# Altium PCB l297_l298.PcbDoc
Units mm, origin at the board's own origin, x right, y up, seen from the top; angles counter-clockwise.
Board outline 152.4 x 101.6 mm, 2 copper layers (Top Layer, Bottom Layer); 24 components, 27 nets, 92 pads, 2 vias.
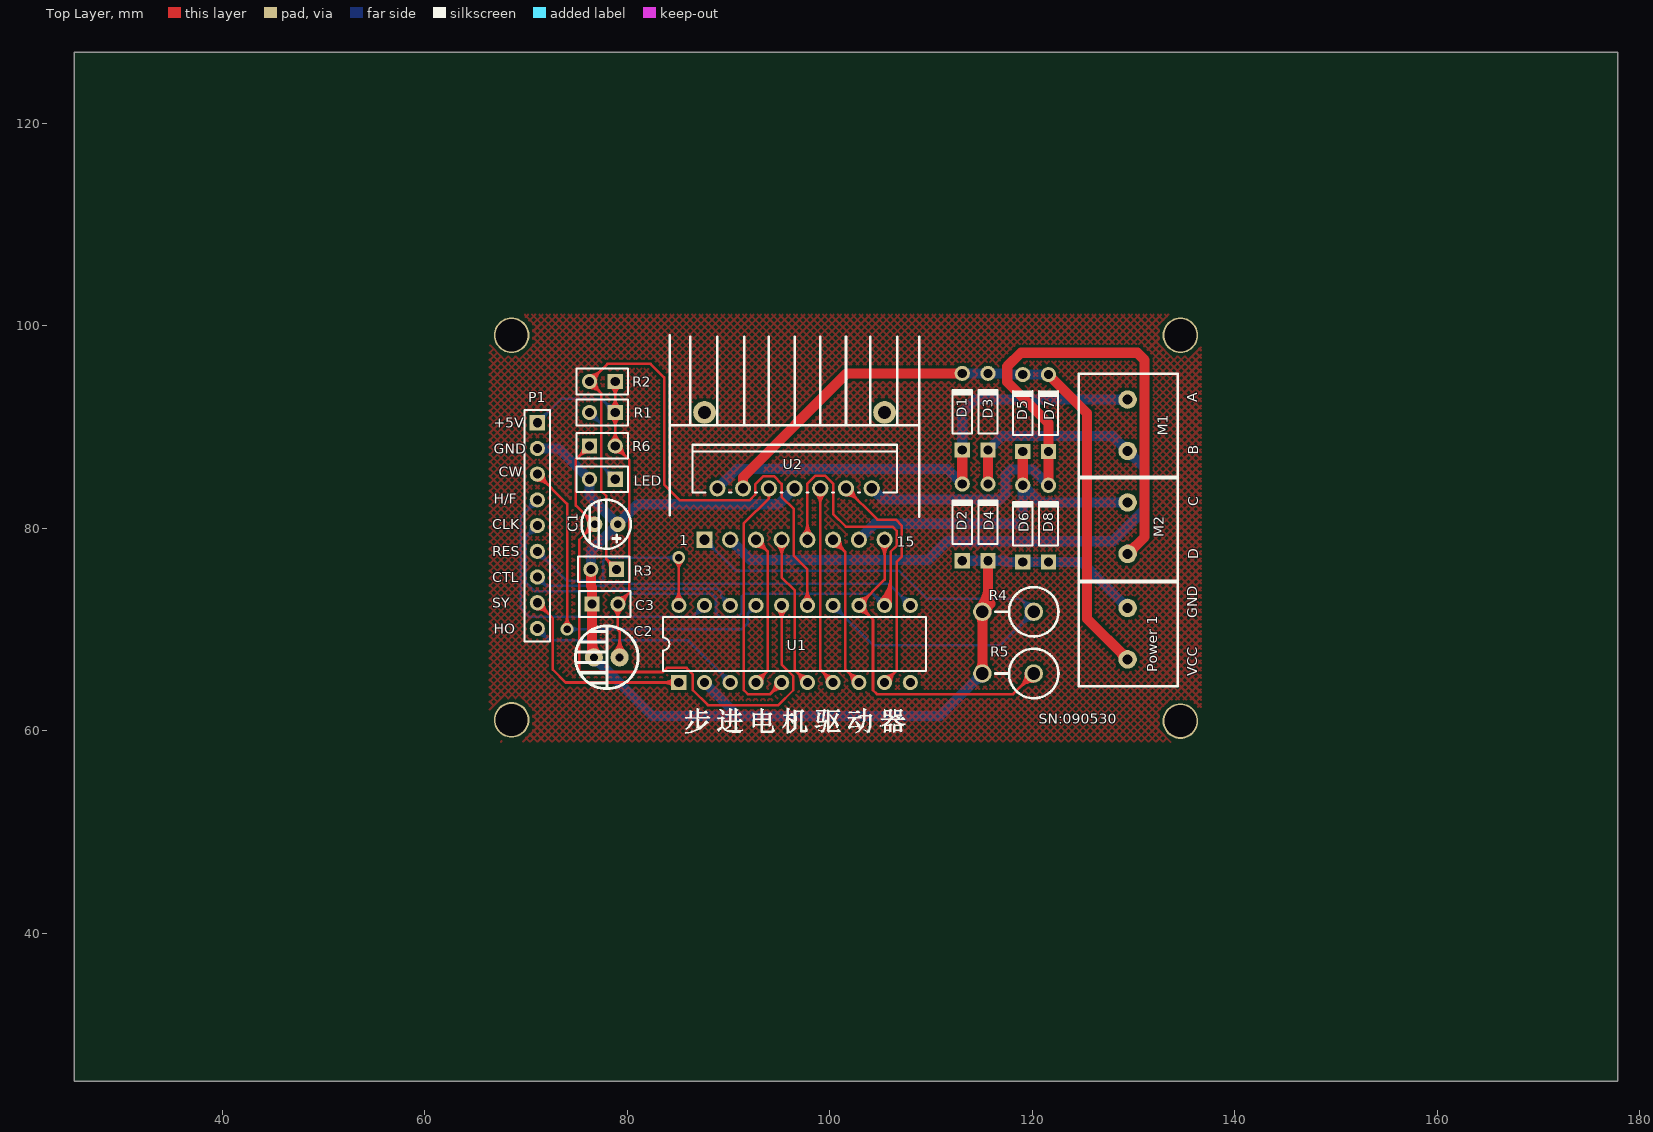
[diagram p0: Top Layer view]
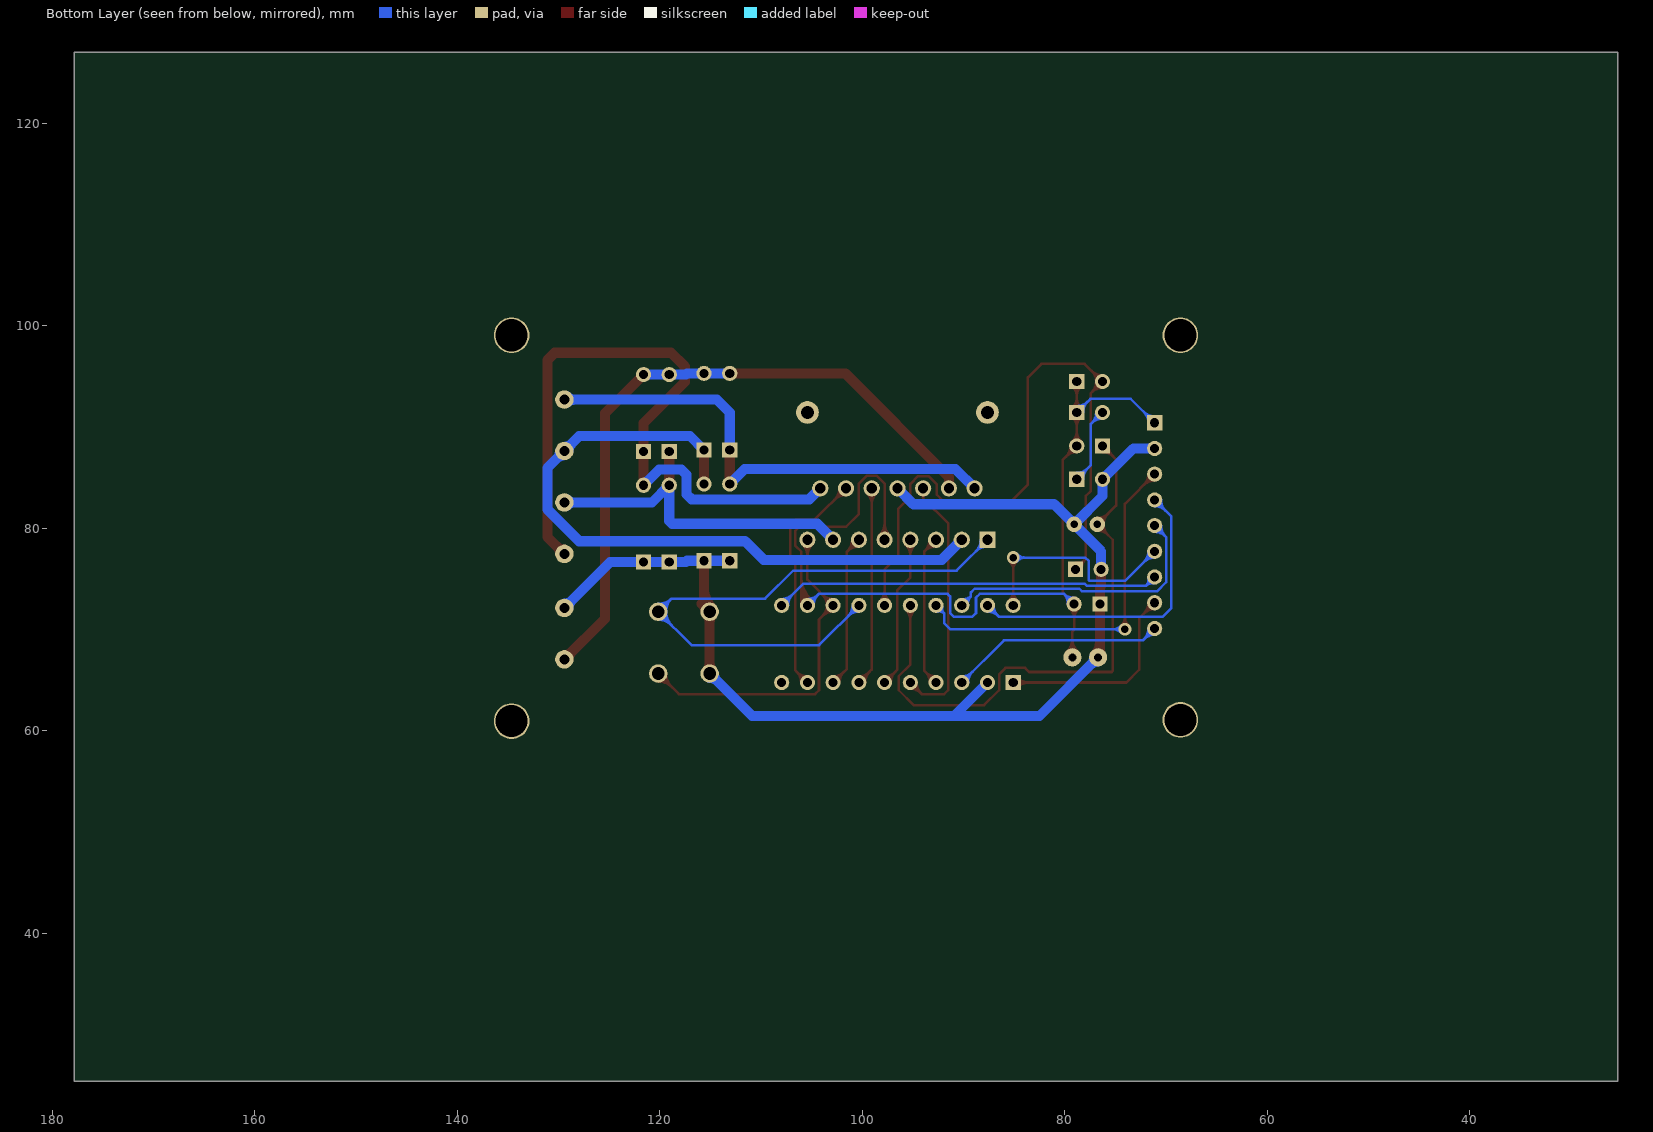
[diagram p1: Bottom Layer view, seen from below]

## Layer stack, top to bottom
Top Layer: signal copper 0.0356
Dielectric: dielectric 0.32, FR-4, Dk 4.8
Bottom Layer: signal copper 0.0356

## Board outline
25.4,25.4 177.8,25.4 177.8,127 25.4,127

## Design rules (kind name [scope] priority, off if disabled: settings)
Clearance [All] p1: gap=0.254
ComponentClearance [All] p1: gap=0.254 collisioncheckmode=3 verticalgap=0.254
PolygonConnect [All] p1: connectstyle=Relief reliefconductorwidth=0.254 reliefentries=4 polygonreliefangle="90 Angle"
RoutingVias [All] p1: holewidth=0.711 width=1.27 viastyle="Through Hole" minholewidth=0.711 minwidth=1.27 maxholewidth=0.711 maxwidth=1.27
SolderMaskExpansion [All] p1: expansion=0.102
TestPointUsage [All] p1: valid=0 allowmultiple=FALSE
Testpoint [All] p1: side=7 testpointundercomponent=TRUE minsize=1.016 maxsize=2.54 preferedsize=1.524 minholesize=0 maxholesize=1.016 preferedholesize=0.813 testpointgrid=0.025 style=1021 order=0123456789
Width Width_6 [InNet('VCC')] p1: maxlimit=1 minlimit=1 preferedwidth=1
Width Width_5 [InNet('NetD7_1')] p2: maxlimit=1 minlimit=1 preferedwidth=1
Width Width_4 [InNet('NetD5_1')] p3: maxlimit=1 minlimit=1 preferedwidth=1
Width Width_3 [InNet('NetD3_1')] p4: maxlimit=1 minlimit=1 preferedwidth=1
Width Width_2 [InNet('NetD1_1')] p5: maxlimit=1 minlimit=1 preferedwidth=1
Width Width_1 [InNet('GND')] p6: maxlimit=1 minlimit=1 preferedwidth=1
Width [All] p7: maxlimit=0.254 minlimit=0.254 preferedwidth=0.254
17 further rules are at their usual default settings.

## Components (designator, comment, footprint, x,y, rotation, side; value= is the part's Value field where it differs from the comment)
C1 "" C-DJ-4 76.657,82.931 r180 top
C2 "" C-DJ-6 76.657,67.183 r180 top
C3 "104" CPDR 77.8,72.517 r0 top
D1 "1N4007" D-ZL-10 113.03,95.25 r90 top
D2 "1N4007" D-ZL-10 113.03,84.328 r90 top
D3 "1N4007" D-ZL-10 115.57,95.25 r90 top
D4 "1N4007" D-ZL-10 115.57,84.328 r90 top
D5 "1N4007" D-ZL-10 118.999,95.123 r90 top
D6 "1N4007" D-ZL-10 118.999,84.201 r90 top
D7 "1N4007" D-ZL-10 121.539,95.123 r90 top
D8 "1N4007" D-ZL-10 121.539,84.201 r90 top
LED "LED" CPDR 77.546,84.836 r180 top (schematic designator DS1)
M1 "" JK128 130.556,92.202 r0 top
M2 "" JK128 130.556,82.042 r0 top
P1 "PZ_9" HDR-9 71.12,75.184 r270 top
"Power 1" "" JK128 130.556,71.628 r0 top
R1 "Res" CPDR 77.546,91.44 r180 top
R2 "Res" CPDR 77.546,94.488 r180 top
R3 "Res" CPDR 77.673,75.946 r180 top
R4 "Res" ZCDZl 117.602,69.215 r270 top
R5 "Res" ZCDZl 117.602,63.119 r270 top
R6 "Res" CPDR 77.546,88.138 r0 top
U1 "L297A" DIP20 96.52,68.58 r0 top
U2 "L298N" L298N 96.52,83.82 r0 top

## Footprints (in the part's own frame and the unit in brackets; to place one, negate y for a bottom-side part, rotate by r counter-clockwise, add the part's x,y. Pads: shape width x height; smd on the part's side, far side on the other; paste and mask are expansions set on the pad)
C-DJ-4 [mil] "电容4mm"
  round 60 hole 30: 1(-95,100) 2(-5,100)
  silkscreen extent -145,5 46,195
C-DJ-6 [mm]
  round 1.8 hole 0.8: 1(-2.591,-0.076) 2(-0.051,-0.076)
  silkscreen extent -4.42,-3.18 1.78,3.02
CPDR [mm] "瓷片电容"
  rect 1.5x1.5 hole 0.9: 1(-1.27,0)
  round 1.5 hole 0.9: 2(1.27,0)
  silkscreen extent -2.54,-1.27 2.54,1.27
D-ZL-10 [mm] "整流二极管"
  rect 1.5x1.5 hole 0.9: 1(-7.532,-0.051)
  round 1.5 hole 0.9: 2(0.048,-0.051)
  silkscreen extent -5.89,-1 -1.49,0.9
DIP20 [mm] "DIP; 20 Leads; Row Spacing 7.62 mm; Pitch 2.54 mm"
  rect 1.5x1.5 hole 0.9: 1(-11.43,-3.81)
  round 1.5 hole 0.9: 2(-8.89,-3.81) 3(-6.35,-3.81) 4(-3.81,-3.81) 5(-1.27,-3.81) 6(1.27,-3.81) 7(3.81,-3.81) 8(6.35,-3.81) 9(8.89,-3.81) 10(11.43,-3.81) 11(11.43,3.81) 12(8.89,3.81) 13(6.35,3.81) 14(3.81,3.81) 15(1.27,3.81) 16(-1.27,3.81) 17(-3.81,3.81) 18(-6.35,3.81) 19(-8.89,3.81) 20(-11.43,3.81)
  silkscreen extent -13,-2.65 13,2.65
HDR-9 [mm]
  rect 1.5x1.5 hole 0.9: 1(-15.24,0)
  round 1.5 hole 0.9: 2(-12.7,0) 3(-10.16,0) 4(-7.62,0) 5(-5.08,0) 6(-2.54,0) 7(0,0) 8(2.54,0) 9(5.08,0)
  silkscreen extent -16.51,-1.27 6.35,1.27
JK128 [mil]
  round 71.81 hole 39.37: 1(-45,20) 2(-45,-180)
  silkscreen extent -235,-285 150,120
L298N [mm] "直流/步进两用驱动器"
  round 2.24 hole 1.262: 0(-8.89,7.62) 0(8.89,7.62)
  rect 1.6x1.6 hole 1: 1(-8.89,-4.953)
  round 1.6 hole 1: 2(-7.62,0.127) 3(-6.35,-4.953) 4(-5.08,0.127) 5(-3.81,-4.953) 6(-2.54,0.127) 7(-1.27,-4.953) 8(0,0.127) 9(1.27,-4.953) 10(2.54,0.127) 11(3.81,-4.953) 12(5.08,0.127) 13(6.35,-4.953) 14(7.62,0.127) 15(8.89,-4.953)
  silkscreen extent -12.32,-2.67 12.32,15.24
ZCDZl [mm] "直插电阻立式插"
  round 1.824 hole 1.262: 1(-2.54,2.54) 2(-2.54,-2.54)
  silkscreen extent -4.98,-1.27 -0.1,4.98

## Part data
C1 C3: library part Cap, "Capacitor"
C2: library part "Cap Pol3", "Polarized Capacitor (Surface Mount)"
D1 D2 D3 D4 D5 D6 D7 D8: library part "Diode 1N4007", "1 Amp General Purpose Rectifier"
LED: "发光二极管"
M1 M2 "Power 1": library part MHDR1X2, "Header, 2-Pin"
P1: "排针——9"
R1 R2 R3 R4 R5 R6: "电阻"
U1: "Stepper Motor Controller"
U2: "Dual Full Bridge Driver"

## Free pads (board coordinates)
  round 3.524 hole 3.162: 0(68.58,61.087) 0(68.58,99.06) 0(134.62,60.96) 0(134.62,99.06)

## Via types
v1: diameter 1.27, hole 0.711, Top Layer to Bottom Layer, 2 vias

## Nets (pads, with @x,y where several pads share a name; then routed paths per layer and width w, separated by ;. In a path a pad name is that pad's centre, name@x,y a point inside that pad or via, vN(x,y) a via of type N, cw(c..) or ccw(c..) an arc to the next point about the centre after c; other vN are vias at no path point)
+5V: C2.1 C3.2 P1.1 R1.1 R2.1 R6.2 U1.12 U2.9 | length 155.1
  Top Layer w0.254: R6.2@78.376,88.579 ccw(c77.312,89.642) 78.816,89.642 ccw(c80.32,89.642) R6.2@79.257,88.579 ; R1.1@78.376,90.999 cw(c77.312,89.936) 78.816,89.936 cw(c80.32,89.936) R1.1@79.257,90.999 ; R1.1@78.376,91.881 ccw(c77.312,92.944) 78.816,92.944 ccw(c80.32,92.944) R1.1@79.257,91.881 ; R2.1@78.376,94.047 cw(c77.312,92.984) 78.816,92.984 cw(c80.32,92.984) R2.1@79.257,94.047 ; R6.2@78.555,88.399 ccw(c77.925,89.029) 78.816,89.029 ccw(c79.707,89.029) R6.2@79.077,88.399 ; R1.1@78.555,91.179 cw(c77.925,90.549) 78.816,90.549 cw(c79.707,90.549) R1.1@79.077,91.179 ; R1.1@78.555,91.701 ccw(c77.925,92.331) 78.816,92.331 ccw(c79.707,92.331) R1.1@79.077,91.701 ; R2.1@78.555,94.227 cw(c77.925,93.597) 78.816,93.597 cw(c79.707,93.597) R2.1@79.077,94.227 ; C3.2@78.63,72.076 cw(c77.566,71.013) 79.07,71.013 cw(c80.574,71.013) C3.2@79.511,72.076 ; C2.1@78.701,67.806 ccw(c77.382,69.125) 79.248,69.125 ccw(c81.114,69.125) C2.1@79.795,67.806 ; C3.2@78.809,72.256 cw(c78.179,71.626) 79.07,71.626 cw(c79.961,71.626) C3.2@79.331,72.256 ; R6.2@78.816,87.515 cw(c78.816,86.011) 79.88,87.074 cw(c80.943,88.138) R6.2@79.439,88.138 ; R6.2@78.816,87.769 cw(c78.816,86.878) 79.446,87.508 cw(c80.076,88.138) R6.2@79.185,88.138 ; R2.1 R1.1 R6.2 80.213,86.741 80.213,73.66 C3.2 79.07,69.977 79.248,69.799 C2.1 ; C2.1@78.881,67.626 ccw(c77.995,68.512) 79.248,68.512 ccw(c80.501,68.512) C2.1@79.615,67.626 ; C3.2@79.07,72.886 ccw(c79.07,73.777) 79.7,73.147 ccw(c80.33,72.517) C3.2@79.439,72.517 ; C3.2@79.07,73.14 ccw(c79.07,74.644) 80.134,73.581 ccw(c81.197,72.517) C3.2@79.693,72.517 ; U2.9@97.314,79.343 ccw(c96.165,80.492) 97.79,80.492 ccw(c99.415,80.492) U2.9@98.266,79.343 ; U2.9@97.494,79.163 ccw(c96.778,79.879) 97.79,79.879 ccw(c98.802,79.879) U2.9@98.086,79.163 ; U2.9 97.79,84.404 98.552,85.166 99.568,85.166 100.33,84.404 100.33,81.407 101.575,80.162 106.185,80.162 106.591,79.756 106.591,78.27 106.02,77.699 106.02,73 ; U1.12@104.969,72.831 ccw(c102.434,75.366) 106.02,75.366 ; U1.12@105.149,72.651 ccw(c103.047,74.753) 106.02,74.753 ; U1.12@105.329,72.471 ccw(c103.661,74.139) 106.02,74.139 ; U1.12 106.02,73 ; U1.12@105.508,72.292 ccw(c104.274,73.526) 106.02,73.526 ; U1.12@105.688,72.112 ccw(c104.887,72.913) 106.02,72.913 ; U1.12@105.69,72.947 ccw(c105.818,73.201) 106.02,73 ; U1.12@105.967,72.67 cw(c106.221,72.798) 106.02,73
  Bottom Layer w0.254: P1.1 73.482,92.786 77.47,92.786 R1.1 ; P1.1@71.12,90.793 ccw(c71.12,91.684) 71.75,91.054 ccw(c72.38,90.424) P1.1@71.489,90.424 ; P1.1@71.12,91.047 ccw(c71.12,92.551) 72.184,91.488 ccw(c73.247,90.424) P1.1@71.743,90.424 ; R1.1@78.193,91.44 ccw(c76.689,91.44) 77.753,92.504 ccw(c78.816,93.567) R1.1@78.816,92.063 ; R1.1@78.447,91.44 ccw(c77.556,91.44) 78.186,92.07 ccw(c78.816,92.7) R1.1@78.816,91.809 ; C3.2 80.074,73.521 ; C3.2@79.086,72.886 ccw(c79.118,73.659) 79.665,73.112 ccw(c80.212,72.565) C3.2@79.439,72.532 ; C3.2@79.096,73.139 ccw(c79.15,74.445) 80.074,73.521 ; C3.2@79.693,72.543 cw(c80.998,72.597) 80.074,73.521 ; U1.12@104.787,72.39 ccw(c103.283,72.39) 104.346,73.454 ccw(c105.41,74.517) U1.12@105.41,73.013 ; U1.12@105.041,72.39 ccw(c104.15,72.39) 104.78,73.02 ccw(c105.41,73.65) U1.12@105.41,72.759 ; U1.12 104.267,73.533 91.567,73.533 91.313,73.279 91.313,71.628 90.932,71.247 89.142,71.247 88.761,71.628 88.761,73.152 88.392,73.521 80.074,73.521
ENA: R4.1 U1.14 U2.1 | length 75.9
  Bottom Layer w0.254: U2.1@87.63,78.194 cw(c87.63,76.569) 88.779,77.718 cw(c89.928,78.867) U2.1@88.303,78.867 ; U2.1@87.63,78.448 cw(c87.63,77.436) 88.345,78.152 cw(c89.061,78.867) U2.1@88.049,78.867 ; U2.1 90.678,75.819 106.807,75.819 109.576,73.05 118.847,73.05 ; U1.14@100.33,71.767 cw(c100.33,70.263) 101.394,71.326 cw(c102.457,72.39) U1.14@100.953,72.39 ; U1.14@100.33,72.021 cw(c100.33,71.13) 100.96,71.76 cw(c101.59,72.39) U1.14@100.699,72.39 ; U1.14 104.267,68.453 116.84,68.453 R4.1 118.847,73.05 ; R4.1@119.357,71.755 cw(c117.462,71.755) 118.802,70.415 cw(c120.142,69.075) R4.1@120.142,70.97 ; R4.1@119.357,71.774 ccw(c117.613,71.816) 118.847,73.05 ; R4.1@119.611,71.755 cw(c118.329,71.755) 119.236,70.849 cw(c120.142,69.942) R4.1@120.142,71.224 ; R4.1@119.611,71.768 ccw(c118.431,71.797) 119.266,72.631 ccw(c120.1,73.466) R4.1@120.129,72.286 ; R4.1@120.123,72.54 cw(c120.081,74.284) 118.847,73.05
ENB: R5.1 U1.13 U2.15 | length 50
  Top Layer w0.254: U1.13@102.87,71.767 cw(c102.87,70.263) 103.934,71.326 cw(c104.997,72.39) 103.493,72.39 cw(c104.997,72.39) 103.934,73.454 cw(c102.87,74.517) U1.13@102.87,73.013 ; U1.13@102.87,72.021 cw(c102.87,71.13) 103.5,71.76 cw(c104.13,72.39) 103.239,72.39 cw(c104.13,72.39) 103.5,73.02 cw(c102.87,73.65) U1.13@102.87,72.759 ; U2.15@104.934,78.391 cw(c103.785,77.242) 105.41,77.242 cw(c107.035,77.242) U2.15@105.886,78.391 ; U2.15@105.114,78.571 cw(c104.398,77.855) 105.41,77.855 cw(c106.422,77.855) U2.15@105.706,78.571 ; U2.15 105.41,74.93 U1.13 104.267,70.993 104.267,64.008 104.648,63.627 118.11,63.627 R5.1 ; R5.1@119.357,65.659 cw(c117.462,65.659) 118.802,64.319 cw(c120.142,62.979) R5.1@120.142,64.874 ; R5.1@119.611,65.659 cw(c118.329,65.659) 119.236,64.753 cw(c120.142,63.846) R5.1@120.142,65.128
GND: "Power 1.1" C1.1 C2.2 C3.1 D2.1 D4.1 D6.1 D8.1 LED.2 P1.2 R3.2 R4.2 R5.2 U1.2 U2.8 | length 136.1
  Top Layer w1: R3.2 76.403,74.295 76.53,74.168 C3.1 76.53,67.437 C2.2 ; 76.53,68.654 ccw(c78.103,68.654) C2.2@76.991,67.542 ; R5.2@114.771,65.95 ccw(c114.067,66.654) 115.062,66.654 ccw(c116.057,66.654) R5.2@115.353,65.95 ; R4.2@114.771,71.464 cw(c114.067,70.76) 115.062,70.76 cw(c116.057,70.76) R4.2@115.353,71.464 ; R4.2@114.771,72.046 ccw(c112.717,74.1) 115.621,74.1 ; R4.2@115.043,72.167 ccw(c115.016,72.771) 115.621,72.771 ; R5.2 R4.2 115.85,72.543 115.621,72.771 ; R4.2@115.062,72.167 ccw(c115.062,73.162) 115.765,72.458 ccw(c116.469,71.755) R4.2@115.474,71.755 ; D4.1 115.621,72.771
  Bottom Layer w1: P1.2 73.228,87.884 LED.2 76.276,83.185 C1.1 ; R3.2 76.403,77.724 C1.1 ; C2.2@76.708,66.859 cw(c76.708,65.894) 77.391,66.576 cw(c78.074,67.259) C2.2@77.108,67.259 ; C2.2 82.499,61.468 90.932,61.468 ; U1.2 90.932,61.468 ; U2.8 94.945,82.372 81.051,82.372 C1.1 ; D2.1 D4.1 117.272,76.796 117.399,76.669 D6.1 D8.1 124.88,76.669 129.413,72.136 ; R5.2@114.65,65.659 cw(c113.655,65.659) 114.359,64.956 cw(c115.062,64.252) R5.2@115.062,65.247 ; R5.2 110.871,61.468 90.932,61.468 ; 129.001,72.136 ccw(c128.006,72.136) 128.71,72.839 ccw(c129.413,73.543) 129.413,72.548
GND-12: 
HOME: P1.9 U1.3 | length 28.8
  Bottom Layer w0.254: P1.9@71.12,69.481 cw(c71.12,67.977) 72.184,69.04 cw(c73.247,70.104) P1.9@71.743,70.104 ; P1.9@71.12,69.735 cw(c71.12,68.844) 71.75,69.474 cw(c72.38,70.104) P1.9@71.489,70.104 ; P1.9 72.288,68.936 86.004,68.936 U1.3 ; U1.3@89.547,64.77 ccw(c88.043,64.77) 89.106,65.834 ccw(c90.17,66.897) U1.3@90.17,65.393 ; U1.3@89.801,64.77 ccw(c88.91,64.77) 89.54,65.4 ccw(c90.17,66.03) U1.3@90.17,65.139
NetC1_2: C1.2 R6.1 U1.16 | length 72.7
  Top Layer w0.254: R6.1@75.653,88.138 cw(c74.149,88.138) 75.213,87.074 cw(c76.276,86.011) R6.1@76.276,87.515 ; R6.1@75.907,88.138 cw(c75.016,88.138) 75.646,87.508 cw(c76.276,86.878) R6.1@76.276,87.769 ; R6.1 74.93,86.792 74.93,82.245 C1.2 75.26,78.867 75.26,65.913 75.362,65.811 83.515,65.811 83.922,66.218 85.852,66.218 86.487,65.583 86.487,64.008 87.96,62.535 94.92,62.535 96.393,64.008 96.393,65.405 95.25,66.548 U1.16 ; C1.2@76.784,79.756 ccw(c76.784,78.223) 75.7,79.307 ccw(c74.616,80.391) 76.149,80.391 ccw(c74.616,80.391) 75.7,81.475 ccw(c76.784,82.559) C1.2@76.784,81.026 ; C1.2@76.784,80.01 ccw(c76.784,79.09) 76.134,79.741 ccw(c75.483,80.391) 76.403,80.391 ccw(c75.483,80.391) 76.134,81.041 ccw(c76.784,81.692) C1.2@76.784,80.772 ; U1.16@94.809,71.949 cw(c93.746,70.886) 95.25,70.886 cw(c96.754,70.886) U1.16@95.691,71.949 ; U1.16@94.989,72.129 cw(c94.359,71.499) 95.25,71.499 cw(c96.141,71.499) U1.16@95.511,72.129
NetD1_1: D1.1 D2.2 M1.1 U2.2 | length 51.1
  Top Layer w1: D2.2 D1.1
  Bottom Layer w1: U2.2 90.805,85.852 111.606,85.852 D2.2 ; D1.1 113.081,91.44 114.351,92.71 M1.1 ; M1.1@129.122,92.419 ccw(c128.418,91.715) 128.418,92.71 ccw(c128.418,93.705) M1.1@129.122,93.001
NetD3_1: D3.1 D4.2 M1.2 U2.3 | length 71.7
  Top Layer w1: D4.2 D3.1
  Bottom Layer w1: U2.3 92.151,76.886 109.728,76.886 111.557,78.715 127.94,78.715 131.089,81.864 131.089,85.954 M1.2 127.94,89.103 117.006,89.103 D3.1 ; M1.2@129.001,87.63 ccw(c128.006,87.63) 128.71,88.333 ccw(c129.413,89.037) M1.2@129.413,88.042 ; M1.2@129.413,87.218 cw(c129.413,86.223) 130.116,86.927 cw(c130.82,87.63) M1.2@129.825,87.63
NetD5_1: D5.1 D6.2 M2.1 U2.13 | length 36.4
  Top Layer w1: D6.2 D5.1
  Bottom Layer w1: U2.13 104.445,80.442 118.771,80.442 119.05,80.721 D6.2 120.75,82.55 M2.1 ; M2.1@129.122,82.259 ccw(c128.418,81.555) 128.418,82.55 ccw(c128.418,83.545) M2.1@129.122,82.841
NetD7_1: D7.1 D8.2 M2.2 U2.14 | length 70.1
  Top Layer w1: D8.2 D7.1 121.59,90.384 117.526,94.449 117.526,95.987 118.872,97.333 130.353,97.333 131.089,96.596 131.089,79.146 M2.2 ; M2.2@129.413,77.882 ccw(c129.413,78.877) 130.116,78.173 ccw(c130.82,77.47) M2.2@129.825,77.47
  Bottom Layer w1: U2.14 105.232,82.855 116.84,82.855 117.348,83.363 117.348,85.293 117.856,85.801 120.038,85.801 D8.2
NetDS1_1: LED.1 R1.2 | length 15.2
  Bottom Layer w0.254: R1.2@76.276,90.817 cw(c76.276,89.313) 77.34,90.376 cw(c78.403,91.44) R1.2@76.899,91.44 ; R1.2@76.276,91.071 cw(c76.276,90.18) 76.906,90.81 cw(c77.536,91.44) R1.2@76.645,91.44 ; R1.2 77.419,90.297 77.419,86.233 LED.1 ; LED.1@78.193,84.836 ccw(c76.689,84.836) 77.753,85.9 ccw(c78.816,86.963) LED.1@78.816,85.459 ; LED.1@78.447,84.836 ccw(c77.556,84.836) 78.186,85.466 ccw(c78.816,86.096) LED.1@78.816,85.205
NetR2_2: R2.2 R3.1 U1.15 | length 80.8
  Top Layer w0.254: R2.2@76.276,93.865 cw(c76.276,92.361) 77.34,93.424 cw(c78.403,94.488) 76.899,94.488 cw(c78.403,94.488) 77.34,95.552 cw(c76.276,96.615) R2.2@76.276,95.111 ; R2.2@76.276,94.119 cw(c76.276,93.228) 76.906,93.858 cw(c77.536,94.488) 76.645,94.488 cw(c77.536,94.488) 76.906,95.118 cw(c76.276,95.748) R2.2@76.276,94.857 ; R3.1@78.321,75.966 ccw(c76.976,76.011) 77.927,76.962 ; R3.1@78.574,75.958 ccw(c77.778,75.984) 78.341,76.548 ccw(c78.905,77.111) R3.1@78.931,76.315 ; R3.1@78.923,76.569 cw(c78.878,77.913) 77.927,76.962 ; R3.1 77.927,76.962 ; U1.15@97.349,72.831 ccw(c96.286,73.894) 97.79,73.894 ccw(c99.294,73.894) U1.15@98.231,72.831 ; U1.15@97.529,72.651 ccw(c96.899,73.281) 97.79,73.281 ccw(c98.681,73.281) U1.15@98.051,72.651 ; U1.15 97.79,75.921 96.444,77.267 96.444,81.89 95.25,83.083 95.25,84.379 94.488,85.141 93.472,85.141 92.634,84.303 92.634,83.312 92.075,82.753 85.217,82.753 83.642,84.328 83.642,94.894 82.296,96.241 78.029,96.241 R2.2 77.419,93.345 77.419,83.693 77.927,83.185 77.927,76.962
NetU1_4: U1.4 U2.5 | length 22.9
  Top Layer w0.254: U1.4 93.853,65.913 93.853,77.724 ; U1.4@92.71,65.139 ccw(c92.71,66.03) 93.34,65.4 ccw(c93.97,64.77) U1.4@93.079,64.77 ; U1.4@92.71,65.393 ccw(c92.71,66.897) 93.774,65.834 ccw(c94.837,64.77) U1.4@93.333,64.77 ; U2.5 93.853,77.724 ; U2.5@92.712,78.448 cw(c92.715,77.449) 93.422,78.155 cw(c94.128,78.862) U2.5@93.129,78.865 ; U2.5@92.712,78.194 cw(c92.718,76.589) 93.853,77.724 ; U2.5@93.383,78.865 ccw(c94.988,78.859) 93.853,77.724
NetU1_5: U1.5 U2.6 | length 30
  Top Layer w0.254: U2.6@93.736,83.32 cw(c93.597,82.963) 93.98,82.963 ; U2.6 93.98,82.963 ; U2.6@94.224,83.32 ccw(c94.363,82.963) 93.98,82.963 ; U1.5@94.627,64.77 cw(c93.123,64.77) 94.186,63.706 cw(c95.25,62.643) U1.5@95.25,64.147 ; U1.5@94.881,64.77 cw(c93.99,64.77) 94.62,64.14 cw(c95.25,63.51) U1.5@95.25,64.401 ; U1.5 94.107,63.627 91.897,63.627 91.516,64.008 91.516,80.499 93.98,82.963
NetU1_6: U1.6 U2.7 | length 23.1
  Top Layer w0.254: U2.7@94.774,78.391 cw(c93.625,77.242) 95.25,77.242 cw(c96.875,77.242) U2.7@95.726,78.391 ; U2.7@94.954,78.571 cw(c94.238,77.855) 95.25,77.855 cw(c96.262,77.855) U2.7@95.546,78.571 ; U2.7 95.25,75.159 96.52,73.889 96.52,66.04 U1.6 ; U1.6@97.167,64.77 ccw(c95.663,64.77) 96.726,65.834 ccw(c97.79,66.897) U1.6@97.79,65.393 ; U1.6@97.421,64.77 ccw(c96.53,64.77) 97.16,65.4 ccw(c97.79,66.03) U1.6@97.79,65.139
NetU1_7: U1.7 U2.10 | length 27.6
  Top Layer w0.254: U2.10@98.584,83.471 cw(c97.435,82.322) 99.06,82.322 cw(c100.685,82.322) U2.10@99.536,83.471 ; U2.10@98.764,83.651 cw(c98.048,82.935) 99.06,82.935 cw(c100.072,82.935) U2.10@99.356,83.651 ; U2.10 99.06,66.04 U1.7 ; U1.7@99.707,64.77 ccw(c98.203,64.77) 99.266,65.834 ccw(c100.33,66.897) U1.7@100.33,65.393 ; U1.7@99.961,64.77 ccw(c99.07,64.77) 99.7,65.4 ccw(c100.33,66.03) U1.7@100.33,65.139
NetU1_8: U1.8 U2.11 | length 23.1
  Top Layer w0.254: U2.11@100.33,78.194 cw(c100.33,76.569) 101.479,77.718 cw(c102.628,78.867) U2.11@101.003,78.867 ; U2.11@100.33,78.448 cw(c100.33,77.436) 101.045,78.152 cw(c101.761,78.867) U2.11@100.749,78.867 ; U2.11 101.524,77.673 101.524,66.116 U1.8 ; U1.8@102.247,64.77 ccw(c100.743,64.77) 101.806,65.834 ccw(c102.87,66.897) U1.8@102.87,65.393 ; U1.8@102.501,64.77 ccw(c101.61,64.77) 102.24,65.4 ccw(c102.87,66.03) U1.8@102.87,65.139
NetU1_9: U1.9 U2.12 | length 31.1
  Top Layer w0.254: U2.12@101.6,83.274 cw(c101.6,81.649) 102.749,82.798 cw(c103.898,83.947) U2.12@102.273,83.947 ; U2.12@101.6,83.528 cw(c101.6,82.516) 102.315,83.232 cw(c103.031,83.947) U2.12@102.019,83.947 ; U2.12 104.699,80.848 106.515,80.848 107.099,80.264 107.099,77.178 106.604,76.683 106.604,65.964 U1.9 ; U1.9@105.41,65.139 ccw(c105.41,66.03) 106.04,65.4 ccw(c106.67,64.77) U1.9@105.779,64.77 ; U1.9@105.41,65.393 ccw(c105.41,66.897) 106.474,65.834 ccw(c107.537,64.77) U1.9@106.033,64.77
VCC: "Power 1.2" D1.2 D3.2 D5.2 D7.2 U2.4 | length 68.5
  Top Layer w1: U2.4 91.44,85.073 101.665,95.298 D1.2 ; D7.2 125.4,91.362 125.4,71.069 129.413,67.056 ; 129.001,67.056 ccw(c128.006,67.056) 128.71,67.759 ccw(c129.413,68.463) 129.413,67.468
  Bottom Layer w1: D1.2 D3.2 117.272,95.298 117.399,95.171 D5.2 D7.2
使能: U1.10
复位: P1.6 U1.20 | length 33.3
  Top Layer w0.254: U1.20@84.649,72.831 ccw(c83.586,73.894) 85.09,73.894 ccw(c86.594,73.894) U1.20@85.531,72.831 ; v1@84.731,76.739 cw(c83.864,75.871) 85.09,75.871 cw(c86.316,75.871) v1@85.449,76.739 ; U1.20@84.829,72.651 ccw(c84.199,73.281) 85.09,73.281 ccw(c85.981,73.281) U1.20@85.351,72.651 ; U1.20 v1(85.09,77.098)
  Bottom Layer w0.254: P1.6@71.12,77.101 cw(c71.12,75.597) 72.184,76.66 cw(c73.247,77.724) P1.6@71.743,77.724 ; P1.6@71.12,77.355 cw(c71.12,76.464) 71.75,77.094 cw(c72.38,77.724) P1.6@71.489,77.724 ; P1.6 74.029,74.815 77.546,74.815 77.627,74.896 77.627,76.747 77.978,77.098 v1(85.09,77.098) ; v1@84.731,76.739 ccw(c83.864,75.871) 83.864,77.098 ccw(c83.864,78.324) v1@84.731,77.457
工作方式: P1.4 U1.19 | length 37.9
  Bottom Layer w0.254: P1.4@70.497,82.804 cw(c68.993,82.804) 70.056,81.74 cw(c71.12,80.677) P1.4@71.12,82.181 ; P1.4@70.751,82.804 cw(c69.86,82.804) 70.49,82.174 cw(c71.12,81.544) P1.4@71.12,82.435 ; P1.4 69.469,81.153 69.469,72.136 70.358,71.247 86.487,71.247 U1.19 ; U1.19@87.007,72.39 cw(c85.503,72.39) 86.566,71.326 cw(c87.63,70.263) U1.19@87.63,71.767 ; U1.19@87.261,72.39 cw(c86.37,72.39) 87,71.76 cw(c87.63,71.13) U1.19@87.63,72.021
斩波器: P1.7 U1.11 | length 43.7
  Bottom Layer w0.254: P1.7 71.997,74.307 ; P1.7@71.21,74.568 cw(c71.344,73.654) 71.997,74.307 ; P1.7@71.736,75.094 ccw(c72.65,74.96) 71.997,74.307 ; U1.11@107.327,72.39 ccw(c105.823,72.39) 106.886,73.454 ccw(c107.95,74.517) U1.11@107.95,73.013 ; U1.11@107.581,72.39 ccw(c106.69,72.39) 107.32,73.02 ccw(c107.95,73.65) U1.11@107.95,72.759 ; U1.11 105.803,74.537 78.042,74.537 77.812,74.307 71.997,74.307
方向: P1.3 U1.17 | length 45.8
  Top Layer w0.254: P1.3@71.12,84.721 cw(c71.12,83.217) 72.184,84.28 cw(c73.247,85.344) P1.3@71.743,85.344 ; P1.3@71.12,84.975 cw(c71.12,84.084) 71.75,84.714 cw(c72.38,85.344) P1.3@71.489,85.344 ; P1.3 74.066,82.398 v1(74.066,70.028) ; v1@73.707,70.387 ccw(c72.84,71.254) 74.066,71.254 ccw(c75.293,71.254) v1@74.426,70.387
  Bottom Layer w0.254: v1(74.066,70.028) 91.285,70.028 91.908,70.652 91.908,71.588 ; v1@74.426,69.669 cw(c75.293,68.801) 75.293,70.028 cw(c75.293,71.254) v1@74.426,70.387 ; U1.17@92.102,72.254 cw(c91.4,72.097) 91.909,71.589 ; U1.17@92.574,71.782 ccw(c92.417,71.08) 91.909,71.589 ; U1.17 91.908,71.588
时钟: P1.5 U1.18 | length 34.2
  Bottom Layer w0.254: P1.5@70.497,80.264 cw(c68.993,80.264) 70.056,79.2 cw(c71.12,78.137) P1.5@71.12,79.641 ; P1.5@70.751,80.264 cw(c69.86,80.264) 70.49,79.634 cw(c71.12,79.004) P1.5@71.12,79.895 ; P1.5 69.977,79.121 69.977,74.676 70.854,73.799 78.32,73.799 78.55,74.029 88.9,74.029 89.269,73.66 89.269,73.291 ; U1.18@89.552,72.467 ccw(c88.568,72.59) 89.269,73.291 ; U1.18@89.804,72.436 ccw(c89.221,72.508) 89.636,72.924 ccw(c90.052,73.339) U1.18@90.124,72.756 ; U1.18@90.093,73.008 cw(c89.97,73.992) 89.269,73.291 ; U1.18 89.269,73.291
时钟输出: P1.8 U1.1 | length 27.7
  Top Layer w0.254: P1.8@71.12,72.021 cw(c71.12,70.517) 72.184,71.58 cw(c73.247,72.644) P1.8@71.743,72.644 ; P1.8@71.12,72.275 cw(c71.12,71.384) 71.75,72.014 cw(c72.38,72.644) P1.8@71.489,72.644 ; P1.8 72.644,71.12 72.644,66.04 73.914,64.77 U1.1 ; U1.1@84.649,64.329 ccw(c83.586,63.266) 83.586,64.77 ccw(c83.586,66.274) U1.1@84.649,65.211 ; U1.1@84.829,64.509 ccw(c84.199,63.879) 84.199,64.77 ccw(c84.199,65.661) U1.1@84.829,65.031
pads on no net: U2.0

## Polygon pours and split planes (outlines as drawn)
no net on Top Layer (hatched 45Degree grid 0.508 track 0.203): 66.421,99.949 67.564,101.092 135.636,101.092 136.652,100.076 136.652,60.071 135.509,58.928 67.564,58.928 66.421,60.071

## Silkscreen, mask and mechanical layers (free items; w line width, h text height)
Top Overlay:
  drawing of 1145 lines, arcs and shapes, not listed
  text "A" at 136.271,92.456 h1.02 r90
  text "+5V" at 66.802,89.916 h1.02
  text "GND" at 66.802,87.376 h1.02
  text "B" at 136.398,87.249 h1.02 r90
  text "CW" at 67.31,85.09 h1.02
  text "H/F" at 66.802,82.423 h1.02
  text "C" at 136.398,82.169 h1.02 r90
  text "CLK" at 66.675,79.883 h1.02
  text "RES" at 66.675,77.216 h1.02
  text "D" at 136.398,76.962 h1.02 r90
  text "CTL" at 66.675,74.676 h1.02
  text "SY" at 66.675,72.136 h1.02
  text "GND" at 136.271,71.12 h1.02 r90
  text "HO" at 66.802,69.596 h1.02
  text "VCC" at 136.271,65.405 h1.02 r90
  text "SN:090530" at 120.65,60.706 h1.02
Mechanical 1:
  lines w0.254: 66.04,103.886 66.04,104.394 ; 67.563,103.629 66.04,104.14 ; 67.565,104.645 66.04,104.14 ; 93.195,104.091 66.04,104.14 ; 110.005,104.062 137.16,104.013 ; 135.635,103.508 137.16,104.013 ; 135.637,104.524 137.16,104.013 ; 137.16,103.759 137.16,104.267 ; 139.192,59.944 139.7,58.42 ; 139.192,102.616 139.7,104.14 ; 139.446,58.42 139.954,58.42 ; 139.446,104.14 139.954,104.14 ; 139.7,74.018 139.7,58.42 ; 139.7,88.542 139.7,104.14 ; 140.208,59.944 139.7,58.42 ; 140.208,102.616 139.7,104.14 ; 66.04,59.69 66.04,100.203 67.437,101.6 135.89,101.6 137.16,100.33 137.16,59.817 135.89,58.547 67.691,58.547 67.31,58.547 66.167,59.69 66.04,59.69
  text "71.1201 (mm)" at 93.448,103.177 h1.52 r359.9
  text "45.72 (mm)" at 140.614,74.272 h1.52 r90

## Text inside footprints (layer, text, board x,y; h text height)
U2: Top Overlay "15" at 106.603,78.158 h1.02; Top Overlay "1" at 85.141,78.329 h1.02